# Altium PCB sparkfun-samd21-mini-breakout.PcbDoc
Units mil, origin at the board's own origin, x right, y up, seen from the top; angles counter-clockwise.
Board outline 700 x 1300 mil, 4 copper layers (Top, Route2, Route15, Bottom), stack 129.528 mil thick; 41 components, 46 nets, 164 pads, 66 vias.
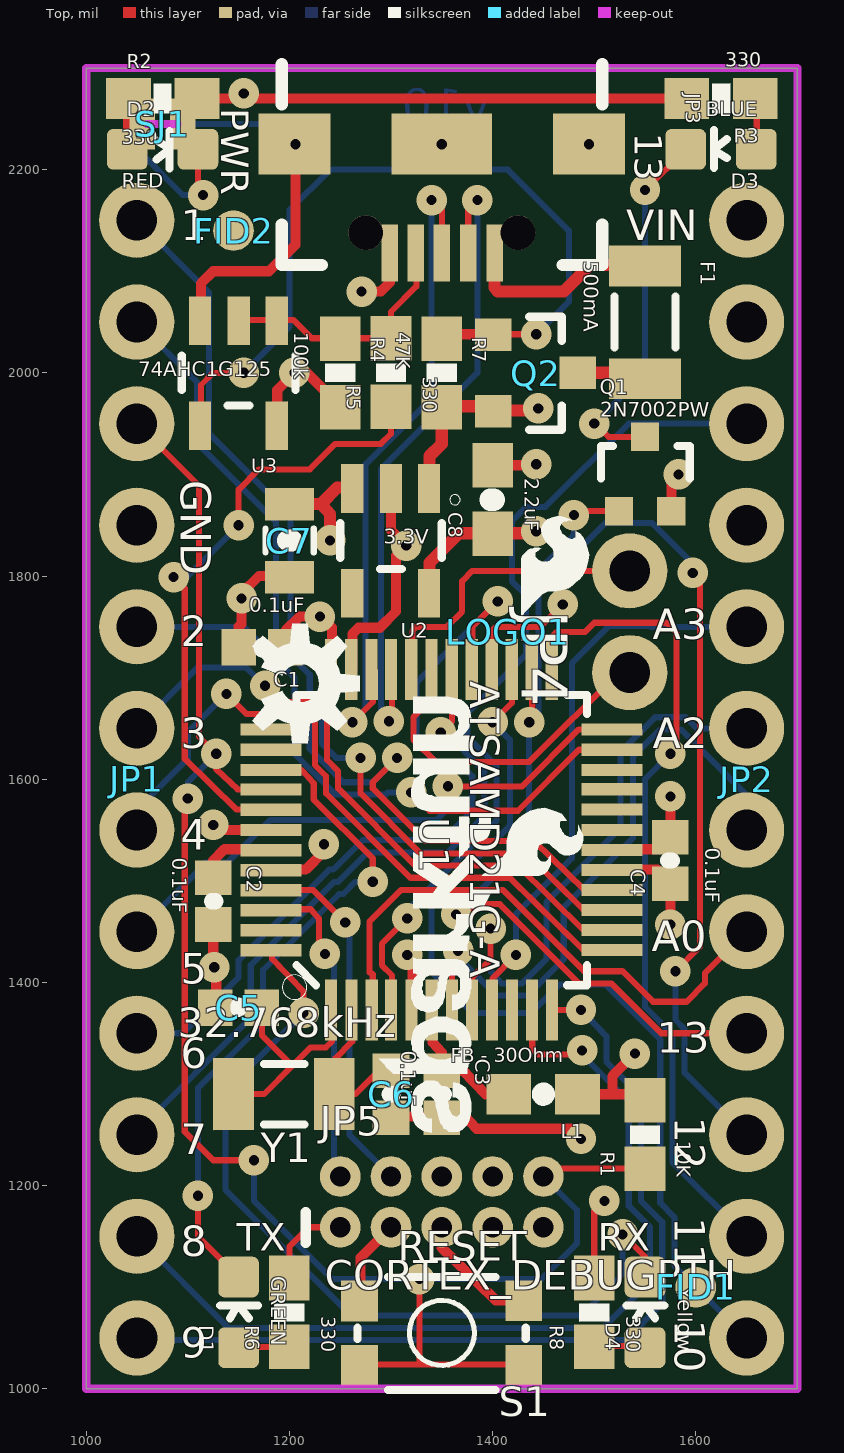
[diagram p0: Top view]
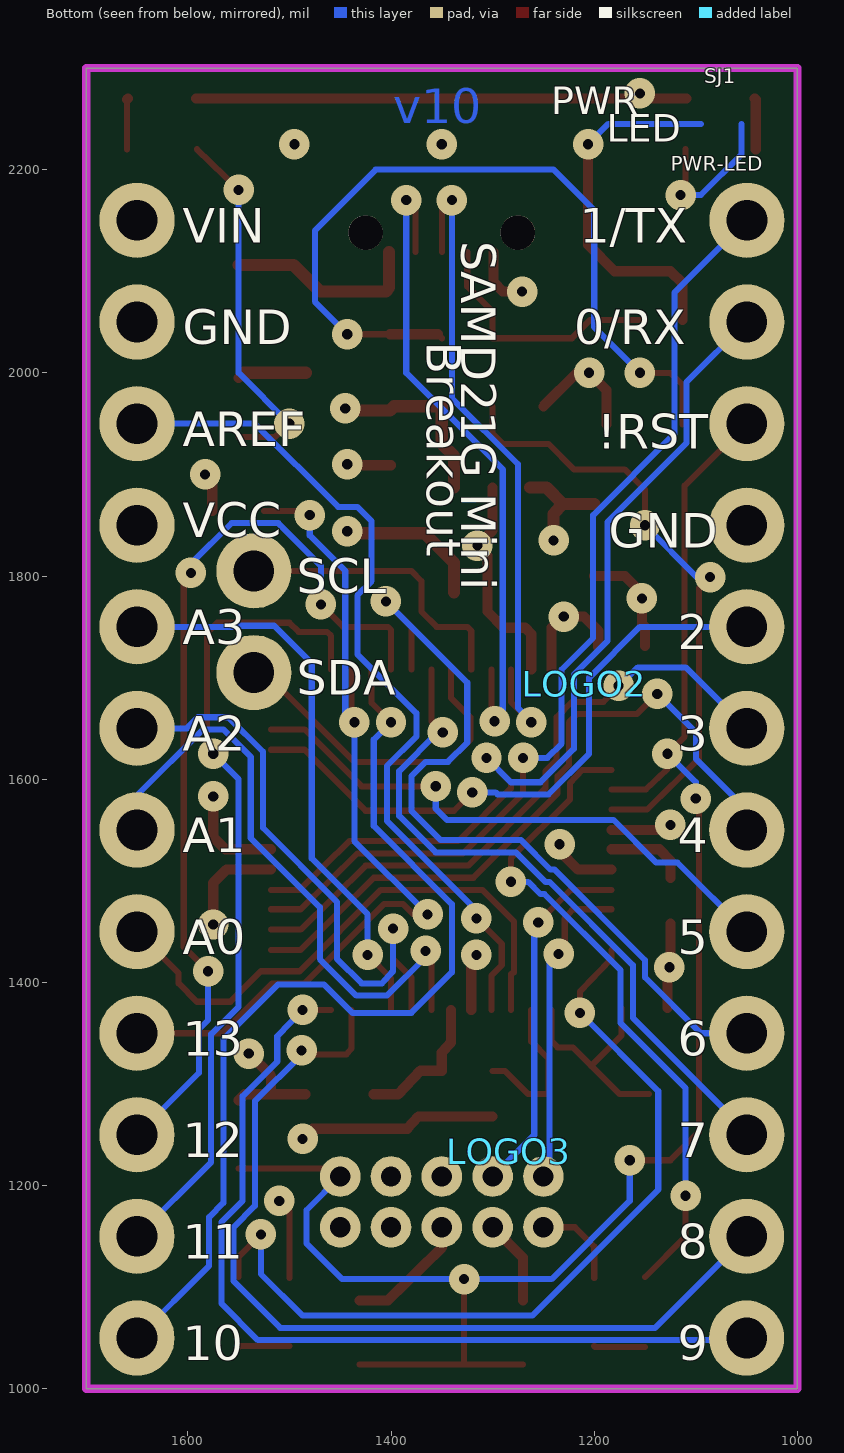
[diagram p1: Bottom view, seen from below]
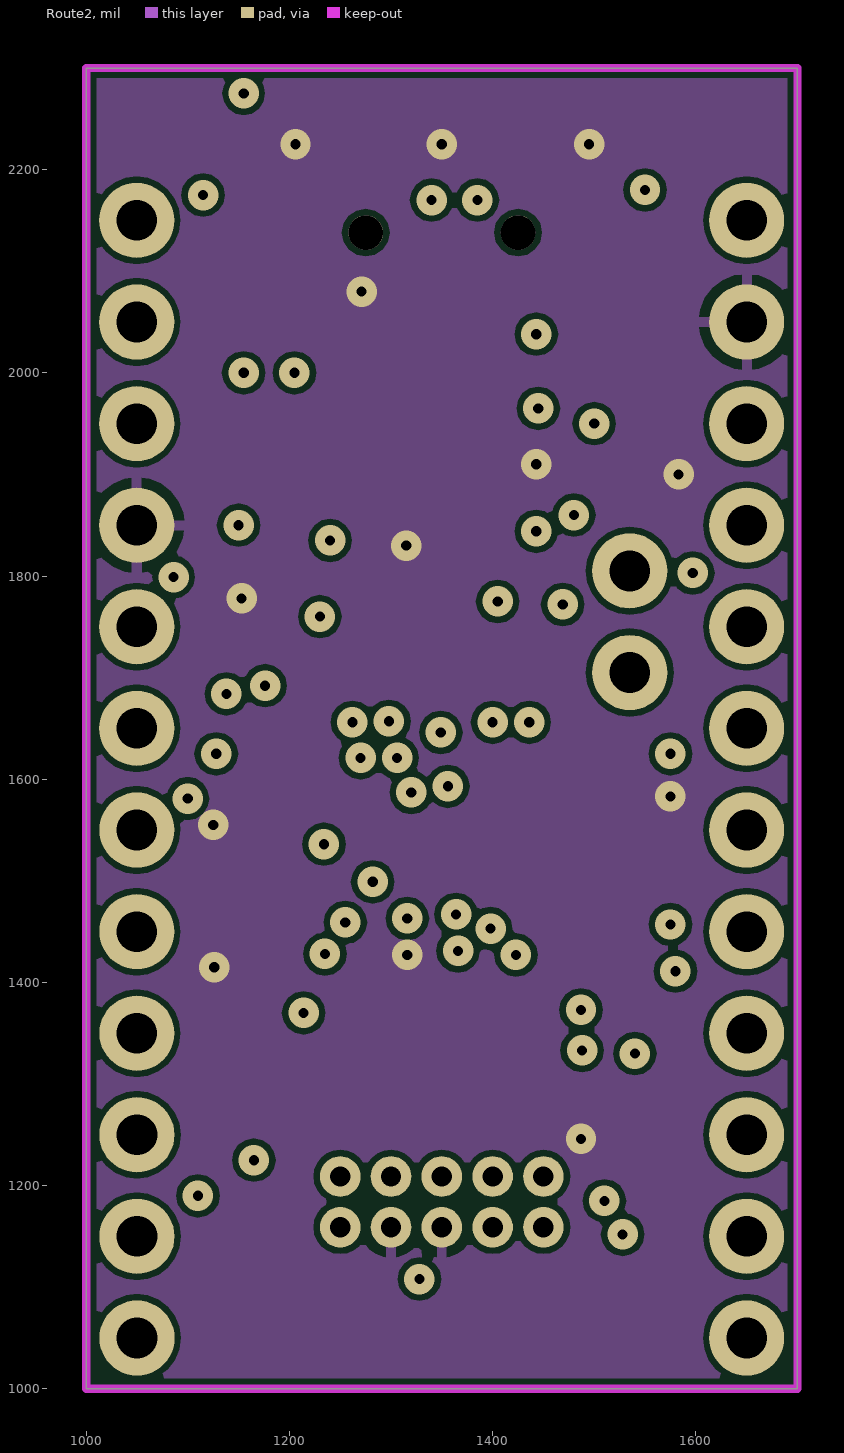
[diagram p2: Route2]
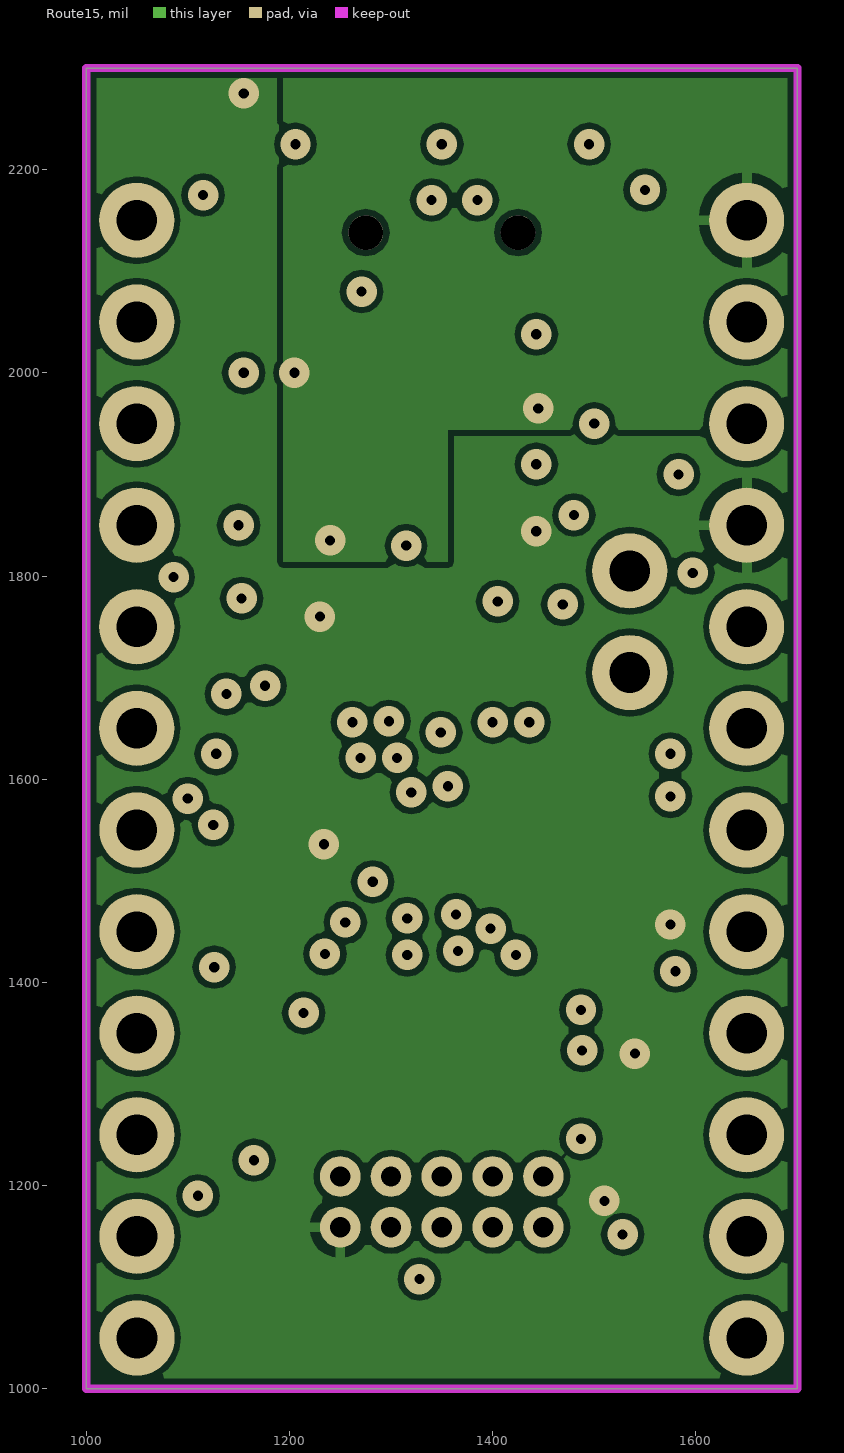
[diagram p3: Route15]

## Layer stack, top to bottom
Top Solder: solder mask 0.4, Solder Resist, Dk 3.5
Top: signal copper 1.378
Dielectric 1: core 59.0551, FR-4, Dk 4.8
Route2: signal copper 1.378
Dielectric 2: core 59.0551, FR-4, Dk 4.8
Route15: signal copper 1.378
Dielectric 3: core 5.9055, FR-4, Dk 4.8
Bottom: signal copper 1.378
Bottom Solder: solder mask 0.4, Solder Resist, Dk 3.5

## Board outline
1000,1000 1000,2300 1700,2300 1700,1000

## Design rules (kind name [scope] priority, off if disabled: settings)
Clearance [All] p1: gap=6 except(0: SMDPad-SMDPad SMDPad-THPad SMDPad-Via)
Clearance "Clearance (Same Net)" [All] p2: gap=0 except(6: SMDPad-SMDPad SMDPad-THPad SMDPad-Via)
HoleSize HoleSize_1 [All] p1: absolutevalues=TRUE maxlimit=100000 minlimit=10 maxpercent=80.000 minpercent=20.000
HoleSize [All] p2: absolutevalues=TRUE maxlimit=100 minlimit=1 maxpercent=80.000 minpercent=20.000
HoleToHoleClearance mdViaViaSameLayer [All] p1: gap=8 allowstackedmicrovias=TRUE
HoleToHoleClearance [All] p2: gap=10 allowstackedmicrovias=TRUE
PasteMaskExpansion mlMinCreamFrame [All] p1: expansion=0
PasteMaskExpansion [All] p2: expansion=0
PolygonConnect ThermalVias [IsVia] p1: connectstyle=Direct reliefconductorwidth=10 reliefentries=4 polygonreliefangle="90 Angle" airgapwidth=10
PolygonConnect [All] p2: connectstyle=Relief reliefconductorwidth=10 reliefentries=4 polygonreliefangle="90 Angle" airgapwidth=10
RoutingVias [All] p1: holewidth=28 width=50 viastyle="Through Hole" minholewidth=28 minwidth=50 maxholewidth=28 maxwidth=50
SilkToSilkClearance [All] p1 off: silktosilkclearance=10
SilkToSolderMaskClearance [IsPad] p1 off: minsilkscreentomaskgap=10 clearancetoexposedcopper=TRUE
SolderMaskExpansion mlMinStopFrame [All] p1: expansion=4
SolderMaskExpansion [All] p2: expansion=4
Width Width_1 [All] p1: maxlimit=100000 minlimit=6 preferedwidth=10
Width [All] p2: maxlimit=10 minlimit=10 preferedwidth=10
25 further rules are at their usual default settings.

## Components (designator, comment, footprint, x,y, rotation, side; value= is the part's Value field where it differs from the comment)
C1 "0.1uF" 0402-CAP 1173,1730 r180.01 top
C2 "0.1uF" 0402-CAP 1125,1480 r270 top
C3 "0.1uF" 0402-CAP 1350,1290 r270 top
C4 "0.1uF" 0402-CAP 1575,1520 r90.02 top
C5 "" 0402-CAP 1150,1375 r0 top
C6 "" 0402-CAP 1300,1290 r270 top
C7 "" 0805-CAP 1200,1835 r270 top
C8 "2.2uF" 0603-CAP 1400,1875 r90.02 top
D1 "GREEN" LED-0603 1150,1075 r0 top
D2 "RED" LED-0603 1075,2220 r270 top
D3 "BLUE" LED-0603 1625,2220 r90.02 top
D4 "Yellow" LED-0603 1550,1075 r0 top
F1 "500mA" PTC-1206 1550,2050 r270 top
FID1 "" FIDUCIAL-1X2 1600,1100 r0 top
FID2 "" FIDUCIAL-1X2 1145,2140 r0 top
FRAME1 "" CREATIVE_COMMONS 500,250 r0 top
JP1 "" 1X12_NO_SILK 1050,1050 r90.02 top
JP2 "" 1X12_NO_SILK 1650,2150 r270 top
JP3 "" USB-AB-MICRO-SMD_V03 1350,2225 r270 top
JP4 "" 1X02_NO_SILK 1535,1705 r90.02 top
JP5 "CORTEX_DEBUGPTH" 2X5-PTH-1.27MM 1350,1184 r0 top
L1 "FB - 30Ohm" 0603 1450,1290 r180.01 top
LOGO1 "" SFE_LOGO_FLAME_.1 1415,1745 r0 top
LOGO2 "" OSHW-LOGO-S 1210,1694 r89.98 bottom
LOGO3 "" SFE_LOGO_NAME_FLAME_.1 1284,1234 r89.98 bottom
Q1 "2N7002PW" SOT323 1550,1900 r0 top
Q2 "" SOT23-3 1440,2000 r270 top
R1 "10K" 0603-RES 1550,1250 r90.02 top
R2 "330" 0603-RES 1075,2270 r0 top
R3 "330" 0603-RES 1625,2270 r180.01 top
R4 "100k" 0603-RES 1250,2000 r270 top
R5 "330" 0603-RES 1300,2000 r90.02 top
R6 "330" 0603-RES 1200,1075 r90.02 top
R7 "47K" 0603-RES 1350,2000 r270 top
R8 "330" 0603-RES 1500,1075 r90.02 top
S1 "RESET" TACTILE_SWITCH_SMD_4.6X2.8MM 1350,1055 r180.01 top
SJ1 "PWR-LED" PAD-JUMPER-2-NC_BY_TRACE_NO_SILK 1075,2245 r180 bottom
U1 "ATSAMD21G-A" TQFP-48 1350,1540 r90.02 top
U2 "3.3V" SOT23-5 1300,1835 r180.01 top
U3 "74AHC1G125" SOT23-5 1150,2000 r180.01 top
Y1 "32.768kHz" CRYSTAL-SMD-3.2X1.5MM 1195,1290 r180.01 top

## Footprints (in the part's own frame and the unit in brackets; to place one, negate y for a bottom-side part, rotate by r counter-clockwise, add the part's x,y. Pads: shape width x height; smd on the part's side, far side on the other; paste and mask are expansions set on the pad)
1X02_NO_SILK [mil] "1X02_NO_SILK"
  round 74 hole 40: 1(0,0) 2(100,0)
1X12_NO_SILK [mil] "1X12_NO_SILK"
  round 74 hole 40: 1(0,0) 2(100,0) 3(200,0) 4(300,0) 5(400,0) 6(500,0) 7(600,0) 8(700,0) 9(800,0) 10(900,0) 11(1000,0) 12(1100,0)
2X5-PTH-1.27MM [mil] "2X5-PTH-1.27MM"
  round 40 hole 20: 1(-100,-25) 2(-100,25) 3(-50,-25) 4(-50,25) 5(0,-25) 6(0,25) 7(50,-25) 8(50,25) 9(100,-25) 10(100,25)
  silkscreen extent -134,-40 -134,-10
0402-CAP [mil] "0402-CAP"
  rect 34x36 smd: 1(-22.83,0) 2(23,0)
  silkscreen extent 0,-1 0,2
0603 [mil] "0603"
  rect 44x40 smd: 1(-33.46,0) 2(34,0)
  silkscreen extent -9,-9 9,9
0603-CAP [mil] "0603-CAP"
  rect 44x40 smd: 1(-33.46,0) 2(34,0)
  silkscreen extent 0,-1 0,2
0603-RES [mil] "0603-RES"
  rect 44x40 smd: 1(-33.46,0) 2(34,0)
  silkscreen extent -9,-15 9,15
0805-CAP [mil] "0805-CAP"
  rect 32x48 smd: 1(-35.43,0) 2(36,0)
  silkscreen extent -12,-24 12,24
CREATIVE_COMMONS [mil] "CREATIVE_COMMONS"
CRYSTAL-SMD-3.2X1.5MM [mil] "CRYSTAL-SMD-3.2X1.5MM"
  rect 40x71 smd: P$1(-49.21,0) P$2(50,0)
  silkscreen extent -20,-30 20,30
FIDUCIAL-1X2 [mil] "FIDUCIAL-1X2"
  rrect100% 40x40 smd: 1(0,0)
LED-0603 [mil] "LED-0603"
  rrect30% 40x40 smd: A(0,-34.53) C(0,35)
  silkscreen extent -18,-6 19,7
OSHW-LOGO-S [mil] "OSHW-LOGO-S"
PAD-JUMPER-2-NC_BY_TRACE_NO_SILK [mil] "PAD-JUMPER-2-NC_BY_TRACE_NO_SILK"
  rect 25x50 smd far side: 1(-20,0) 2(20,0)
  Bottom keep-out lines w8: 15,0 -15,0
PTC-1206 [mil] "PTC-1206"
  rect 40x71 smd: 1(-55.12,0) 2(56,0)
  silkscreen extent -25,-30 25,30
SFE_LOGO_FLAME_.1 [mil] "SFE_LOGO_FLAME_.1"
  silkscreen extent 13,15 80,114
SFE_LOGO_NAME_FLAME_.1 [mil] "SFE_LOGO_NAME_FLAME_.1"
SOT23-3 [mil] "SOT23-3"
  rect 32x36 smd: 1(-37.4,-39.37) 2(38,-39.37) 3(0,44)
  silkscreen extent -55,-4 56,28
SOT23-5 [mil] "SOT23-5"
  rect 22x48 smd: 1(-37.4,-51.19) 2(0,-51.19) 3(38,-51.19) 4(38,52) 5(-37.4,52)
  silkscreen extent -68,-45 50,28
SOT323 [mil] "SOT323"
  rect 28x28 smd: 1(-25.59,-36.42) 2(26,-36.42) 3(0,37)
  silkscreen extent -43,-4 44,28
TACTILE_SWITCH_SMD_4.6X2.8MM [mil] "TACTILE_SWITCH_SMD_4.6X2.8MM"
  rect 36x40 smd: 1(-80.71,-31.5) 2(81,-31.5) 3(81,32) 4(-80.71,32)
  silkscreen extent -83,-55 83,56
TQFP-48 [mil] "TQFP-48"
  rect 60x12 smd: 1(-167.32,109) 2(-167.32,89) 3(-167.32,69) 4(-167.32,50) 5(-167.32,30) 6(-167.32,10) 7(-167.32,-9.84) 8(-167.32,-29.53) 9(-167.32,-49.21) 10(-167.32,-68.9) 11(-167.32,-88.58) 12(-167.32,-108.27) 25(168,-108.27) 26(168,-88.58) 27(168,-68.9) 28(168,-49.21) 29(168,-29.53) 30(168,-9.84) 31(168,10) 32(168,30) 33(168,50) 34(168,69) 35(168,89) 36(168,109)
  rect 12x60 smd: 13(-108.27,-167.32) 14(-88.58,-167.32) 15(-68.9,-167.32) 16(-49.21,-167.32) 17(-29.53,-167.32) 18(-9.84,-167.32) 19(10,-167.32) 20(30,-167.32) 21(50,-167.32) 22(69,-167.32) 23(89,-167.32) 24(109,-167.32) 37(109,168) 38(89,168) 39(69,168) 40(50,168) 41(30,168) 42(10,168) 43(-9.84,168) 44(-29.53,168) 45(-49.21,168) 46(-68.9,168) 47(-88.58,168) 48(-108.27,168)
  silkscreen extent -157,-143 143,157
USB-AB-MICRO-SMD_V03 [mil] "USB-AB-MICRO-SMD_V03"
  round 34 hole 34: 1(87,-74.8) 1(87,75)
  rect 56x16 smd: D+1(107,0) D-1(107,26) GND1(107,-51.18) ID1(107,-25.59) VBUS1(107,52)
  rect 60x71 smd: SHIELD1(0,145) SHIELD3(0,-144.88)
  rect 60x99 smd: SHIELD2(0,0)
  silkscreen extent -79,-157 119,158

## Part data
C1 C2 C3 C4 C5 C6: library part 0402-CAP
C7: library part 0805-CAP
C8: library part 0603-CAP
D1 D2 D3 D4: library part LED-0603
F1: library part PTC-1206
FID1 FID2: library part FIDUCIAL-1X2
FRAME1: library part CREATIVE_COMMONS
JP1 JP2: library part 1X12_NO_SILK
JP3: library part USB-AB-MICRO-SMD_V03
JP4: library part 1X02_NO_SILK
JP5: library part 2X5-PTH-1.27MM
L1: library part 0603
LOGO1: library part SFE_LOGO_FLAME_.1
LOGO2: library part OSHW-LOGO-S
LOGO3: library part SFE_LOGO_NAME_FLAME_.1
Q1: library part SOT323
Q2: library part SOT23-3
R1 R2 R3 R4 R5 R6 R7 R8: library part 0603-RES
S1: library part TACTILE_SWITCH_SMD_4.6X2.8MM
SJ1: library part PAD-JUMPER-2-NC_BY_TRACE_NO_SILK
U1: library part TQFP-48
U2 U3: library part SOT23-5
Y1: library part CRYSTAL-SMD-3.2X1.5MM

## Via types
v1: diameter 30/30/30/30 (per signal layer), hole 10, Top to Bottom, 66 vias

## Nets (pads, with @x,y where several pads share a name; then routed paths per layer and width w, separated by ;. In a path a pad name is that pad's centre, name@x,y a point inside that pad or via, vN(x,y) a via of type N, cw(c..) or ccw(c..) an arc to the next point about the centre after c; other vN are vias at no path point)
3.3V: C1.1 C4.1 C8.1 JP2.4 JP5.1 L1.1 R1.2 R2.2 R3.2 R6.2 R8.2 U1.17 U1.36 U1.44 U2.5 | length 1202.5
  Top w6: R6.2 1200,1140 1219,1159 JP5.1 ; R8.2 1500,1175 v1(1510,1185)
  Top w10: R2.2 1150,2270 v1(1155,2275) 1160,2270 R3.2@1592,2270 ; U1.44@1183,1511 1216,1511 1234,1529 v1(1234,1536) ; C1.1@1196,1730 1196,1746 1210,1760 v1(1230,1760) 1242,1749 U1.36@1242,1708 ; L1.1@1484,1290 1518,1290 ; U1.17@1518,1511 1562,1511 1575,1498 v1(1575,1457) ; v1(1540,1330) 1518,1308 1518,1290 ; R1.2 1544,1290 1518,1290
  Top w12: U2.5@1338,1784 1338,1813 1367,1842 1400,1842 1441,1842 v1(1443,1844)
!RESET: JP1.10 JP5.10 R1.1 S1.3 S1.4 U1.40 | length 1732.1
  Top w6: JP1.10@1050,1950 1111,1889 1111,1642 v1(1128,1625) 1128,1610 1149,1590 U1.40@1183,1590 ; v1(1100,1581) 1097,1578 1097,1253 1125,1225 v1(1165,1225) ; S1.3@1270,1024 1328,1024 ; v1(1328,1108) 1328,1024 ; S1.4@1431,1024 1328,1024 ; JP5.10 1458,1217 R1.1@1550,1217
  Bottom w6: v1(1100,1581) 1100,1597 v1(1128,1625) ; v1(1165,1225) 1165,1185 1242,1108 v1(1328,1108) 1448,1108 1483,1143 1483,1176 JP5.10
A0: JP2.8 U1.3 | length 552.4
  Top w6: U1.3@1282,1373 1282,1408 1279,1410 1279,1460 1310,1491 1410,1491 1490,1411 1528,1411 1558,1381 1591,1381 1609,1399 1609,1409 JP2.8
A1: JP2.7 U1.7 | length 612.4
  Top w6: U1.7@1360,1373 1360,1425 v1(1366,1431)
  Bottom w6: v1(1366,1431) 1366,1425 1404,1387 1434,1387 1470,1423 1470,1474 1538,1542 1538,1622 1565,1649 1585,1649 1650,1584 JP2.7
A2: JP2.6 U1.8 | length 576.6
  Top w6: U1.8@1380,1373 1380,1405 1398,1423 v1(1398,1453)
  Bottom w6: v1(1398,1453) 1398,1411 1409,1399 1429,1399 1453,1423 1453,1479 1526,1552 1526,1627 1560,1661 1590,1661 1601,1650 JP2.6
A3: JP2.5 U1.9 | length 561
  Top w6: U1.9@1400,1373 1400,1404 v1(1423,1427)
  Bottom w6: v1(1423,1427) 1423,1467 1478,1522 1478,1714 1515,1751 1555,1751 1556,1750 JP2.5
AREF: JP2.3 U1.4 | length 844.5
  Top w6: U1.4@1301,1373 1301,1407 1291,1417 1291,1438 v1(1316,1463)
  Bottom w6: v1(1316,1463) 1316,1471 1404,1559 1404,1613 1375,1642 1375,1665 1433,1723 1433,1781 1419,1795 1419,1854 1433,1868 1452,1868 1534,1950 JP2.3
D0/RXI: JP1.11 U1.16 | length 917.1
  Top w6: v1(1306,1621) 1282,1597 1282,1591 1334,1539 1441,1539 1490,1491 U1.16@1518,1491
  Bottom w6: JP1.11@1050,2050 1109,1991 1109,1931 1187,1853 1187,1736 1220,1703 1220,1630 1253,1597 1282,1597 v1(1306,1621)
D1/TXO: JP1.12 U1.15 | length 964.1
  Top w6: v1(1270,1621) 1270,1586 1329,1527 1433,1527 1489,1472 U1.15@1518,1472
  Bottom w6: JP1.12@1050,2150 1121,2079 1121,1940 1201,1860 1201,1739 1232,1708 1232,1635 1246,1621 v1(1270,1621)
D2: JP1.8 U1.23 | length 613.4
  Top w6: v1(1320,1587) 1338,1569 1425,1569 1485,1629 U1.23@1518,1629
  Bottom w6: JP1.8@1050,1750 1155,1750 1205,1700 1205,1625 1245,1585 1295,1585 1297,1587 v1(1320,1587)
D3: JP1.7 U1.14 | length 634
  Top w6: v1(1176,1692) 1191,1676 1222,1676 1237,1661 1237,1619 1248,1608 1248,1591 1324,1515 1425,1515 1489,1452 U1.14@1518,1452
  Bottom w6: JP1.7@1050,1650 1110,1710 1157,1710 v1(1176,1692)
D4: JP1.6 U1.13 | length 689.1
  Top w6: v1(1138,1684) 1158,1664 1217,1664 1225,1656 1225,1614 1236,1603 1236,1586 1319,1503 1417,1503 1489,1432 U1.13@1518,1432
  Bottom w6: JP1.6@1050,1550 1050,1570 1100,1620 1100,1646 v1(1138,1684)
D5: JP1.5 U1.24 | length 563.3
  Top w6: v1(1356,1593) 1429,1593 1485,1649 U1.24@1518,1649
  Bottom w6: JP1.5@1050,1450 1118,1518 1139,1518 1181,1560 1345,1560 1356,1571 v1(1356,1593)
D6: JP1.4 U1.29 | length 782.8
  Top w6: U1.29@1380,1708 1380,1750 v1(1405,1775)
  Bottom w6: JP1.4@1050,1350 1095,1350 1150,1405 1150,1422 1239,1511 1243,1511 1272,1540 1351,1540 1380,1569 1380,1603 1366,1617 1344,1617 1325,1636 1325,1695 v1(1405,1775)
D7: JP1.3 U1.30 | length 673.6
  Top w6: v1(1349,1646) 1360,1657 U1.30@1360,1708
  Bottom w6: JP1.3@1050,1250 1050,1253 1162,1365 1162,1417 1244,1499 1248,1499 1277,1528 1356,1528 1392,1564 1392,1608 1354,1646 v1(1349,1646)
D8: JP1.2 U1.11 | length 907.6
  Top w6: U1.11@1439,1373 1439,1335 1444,1329 1484,1329 v1(1488,1333)
  Bottom w6: JP1.2 1140,1060 1509,1060 1555,1106 1555,1159 1534,1180 1534,1283 1488,1329 v1(1488,1333)
D9: JP1.1 U1.12 | length 882.6
  Top w6: U1.12@1459,1373 v1(1487,1373)
  Bottom w6: JP1.1 1052,1048 1531,1048 1567,1084 1567,1164 1546,1185 1546,1288 1512,1322 1512,1347 v1(1487,1373)
D10/SS: JP2.12 U1.27 | length 949.5
  Top w6: v1(1400,1656) 1419,1675 U1.27@1419,1708
  Bottom w6: v1(1400,1656) 1417,1639 1417,1554 1340,1477 1340,1410 1380,1370 1438,1370 1466,1398 1511,1398 1565,1344 1565,1183 1579,1169 1579,1121 JP2.12
D11/MOSI: JP2.11 U1.25 | length 812.8
  Top w6: U1.25@1459,1708 1459,1741 1463,1745 1491,1745 1500,1754 1571,1754 1581,1744 1581,1631 v1(1575,1625)
  Bottom w6: v1(1575,1625) 1550,1600 1550,1376 1577,1349 1577,1223 JP2.11
D12/MISO: JP2.10 U1.28 | length 922.2
  Top w6: U1.28@1400,1708 1400,1747 1403,1750 1447,1750 v1(1469,1772) ; v1(1580,1411) 1604,1435 1604,1796 v1(1597,1803)
  Bottom w6: v1(1469,1772) 1469,1810 1511,1852 1557,1852 1597,1812 v1(1597,1803) ; v1(1580,1411) 1580,1363 1589,1354 1589,1311 JP2.10
D13/SCK: JP2.9 Q1.1 U1.26 | length 883.7
  Top w6: v1(1364,1467) 1378,1467 1388,1477 1407,1477 1485,1399 1517,1399 1566,1350 JP2.9 ; v1(1436,1656) 1439,1659 U1.26@1439,1708 ; v1(1480,1860) 1484,1864 Q1.1@1525,1864
  Bottom w6: v1(1364,1467) 1436,1539 v1(1436,1656) 1445,1665 1445,1805 1480,1840 v1(1480,1860)
GND: C1.2 C2.2 C3.2 C4.2 C5.1 C6.2 C7.2 C8.2 JP1.9 JP2.2 JP3.GND1 JP3.SHIELD1 JP3.SHIELD2 JP3.SHIELD3 JP5.3 JP5.5 Q1.2 S1.1 S1.2 SJ1.1 U1.5 U1.18 U1.35 U1.42 U2.2 U3.3 | length 1548.2
  Top w6: v1@1125,1416 v1(1126,1415) ; C1.2@1150,1731 C1.2@1151,1730 ; v1(1153,1778) v1@1153,1783
  Top w10: U3.3@1113,2052 1113,2088 1125,2100 1180,2100 1206,2126 v1(1206,2225) JP3.SHIELD3@1201,2220 ; v1@1125,1416 C2.2@1125,1458 ; v1(1125,1555) 1130,1550 U1.42@1183,1550 ; v1(1126,1415) 1128,1414 C5.1@1128,1375 ; C1.2@1150,1731 1150,1750 1153,1753 v1(1153,1778) ; v1@1153,1783 1170,1800 C7.2@1200,1800 ; U1.35@1262,1708 1262,1743 1268,1749 1289,1749 1305,1765 1305,1820 v1(1315,1830) 1300,1845 U2.2@1300,1887 ; S1.2@1270,1087 1270,1129 JP5.3 ; v1(1271,2080) 1290,2080 1299,2089 JP3.GND1@1299,2119 ; C6.2@1300,1268 1350,1268 1373,1268 1384,1256 1477,1256 v1(1487,1246) ; v1(1316,1427) 1321,1422 U1.5@1321,1373 ; JP5.5 1350,1139 1403,1087 S1.1@1431,1087 ; C8.2 1442,1909 v1(1443,1910) ; U1.18@1518,1531 1563,1531 C4.2 v1(1575,1583) ; Q1.2@1576,1864 1576,1893 v1(1583,1900)
  Bottom w6: 1095,2245 1186,2245 v1(1206,2225)
  other v1: 1350,2225 1495,2225
N$1: F1.1 JP3.VBUS1 | length 195.8
  Top w12: JP3.VBUS1@1402,2119 1402,2084 1405,2080 1470,2080 1496,2106 F1.1@1550,2106
N$2: C5.2 U1.1 Y1.P$2 | length 218
  Top w6: Y1.P$2@1146,1290 1175,1290 1203,1318 ; C5.2 1173,1348 1203,1318 ; U1.1@1242,1373 1242,1342 1236,1336 1221,1336 1203,1318
N$3: D3.C Q1.3 | length 363.1
  Top w6: v1(1500,1950) 1514,1937 Q1.3 ; v1(1550,2180) D3.C@1591,2220
  Bottom w6: v1(1500,1950) 1550,2000 v1(1550,2180)
N$4: C6.1 U1.2 Y1.P$1 | length 154.6
  Top w6: U1.2@1262,1373 1262,1342 1245,1325 1245,1290 1265,1290 1288,1313 C6.1@1300,1313
N$5: D2.A R2.1 | length 50.4
  Top w10: D2.A@1041,2220 1041,2269 R2.1@1042,2270
N$6: D3.A R3.1 | length 50.4
  Top w6: D3.A@1660,2220 R3.1@1660,2269
  Top w10: R3.1@1659,2270 R3.1@1660,2269
N$7: F1.2 Q2.3 | length 68.1
  Top w10: F1.2@1545,2000 F1.2@1550,1995
  Top w12: Q2.3 F1.2@1545,2000
N$8: JP3.ID1 R4.1 R5.2 U3.1 U3.2 | length 252.8
  Top w6: U3.2@1150,2052 1188,2052 1204,2052 1222,2034 1250,2034 R5.2 1300,2060 1325,2085 JP3.ID1@1325,2119
N$9: Q2.1 R7.1 U3.4 | length 790.9
  Top w6: U3.4@1113,1949 1113,1988 1125,2000 v1(1155,2000) ; R7.1@1350,2034 R7.1@1354,2038 ; Q2.1@1401,2038 v1(1443,2038)
  Top w10: R7.1@1354,2038 Q2.1@1401,2038
  Bottom w6: v1(1155,2000) 1200,2045 1200,2160 1240,2200 1415,2200 1475,2140 1475,2070 v1(1443,2038)
N$10: D1.A R6.1 | length 50.4
  Top w6: D1.A@1150,1041 1199,1041 R6.1@1200,1042
N$11: D4.A R8.1 | length 50.4
  Top w6: R8.1@1500,1042 1549,1042 D4.A@1550,1041
N$12: D2.C SJ1.2 | length 153.4
  Top w6: D2.C 1110,2181 v1(1115,2175)
  Bottom w6: 1055,2245 1055,2215 1095,2175 v1(1115,2175)
RX_LED: D4.C U1.48 | length 829.9
  Top w6: U1.48@1183,1432 1183,1423 1214,1391 v1(1214,1370) ; v1(1528,1152) 1550,1130 D4.C
  Bottom w6: v1(1214,1370) 1137,1293 1137,1196 1261,1072 1487,1072 1528,1113 v1(1528,1152)
SCL: JP4.2 U1.32 | length 294
  Top w6: U1.32@1321,1708 1321,1746 1325,1750 1355,1750 1370,1765 1370,1795 1380,1805 JP4.2
SDA: JP4.1 U1.31 | length 336.4
  Top w6: U1.31@1340,1708 1341,1708 1341,1680 1322,1661 1322,1639 1344,1617 1436,1617 1524,1705 JP4.1
SWCLK: JP5.4 U1.45 | length 353.9
  Top w6: U1.45@1183,1491 1223,1491 v1(1255,1459)
  Bottom w6: v1(1255,1459) 1255,1458 1259,1454 1259,1250 JP5.4
SWDIO: JP5.2 U1.46 | length 312.7
  Top w6: U1.46@1183,1472 1221,1472 1229,1463 1229,1434 v1(1235,1428)
  Bottom w6: v1(1235,1428) 1244,1419 1244,1215 JP5.2
TX_LED: D1.C U1.39 | length 656.8
  Top w6: v1(1110,1190) 1110,1150 D1.C ; U1.39@1183,1609 1212,1609 1224,1596 1224,1580 1282,1522 v1(1282,1499)
  Bottom w6: v1(1110,1190) 1110,1296 1174,1360 1174,1412 1249,1487 1253,1487 1265,1499 v1(1282,1499)
USB_D+: JP3.D+1 U1.34 | length 661.5
  Top w6: v1(1262,1656) 1282,1676 U1.34@1282,1708 ; v1(1340,2170) 1350,2160 JP3.D+1@1350,2119
  Bottom w6: v1(1262,1656) 1275,1670 1275,1910 1340,1975 v1(1340,2170)
USB_D-: JP3.D-1 U1.33 | length 662.6
  Top w6: v1(1298,1657) 1301,1660 U1.33@1301,1708 ; JP3.D-1@1376,2119 1376,2161 v1(1385,2170)
  Bottom w6: v1(1298,1657) 1290,1665 1290,1905 1385,2000 v1(1385,2170)
USB_HOST_EN: R5.1 U1.41 | length 609.9
  Top w6: v1(1086,1799) 1097,1788 1097,1620 1148,1570 U1.41@1183,1570 ; v1(1150,1850) 1150,1885 1170,1905 1220,1905 1245,1930 1290,1930 1300,1940 R5.1@1300,1967
  Bottom w6: v1(1086,1799) 1099,1799 v1(1150,1850)
VDDANA: C3.1 L1.2 U1.6 | length 140.3
  Top w10: U1.6@1341,1373 1341,1341 1350,1331 1350,1313 1371,1313 1393,1290 L1.2@1417,1290
VDDCORE: C2.1 U1.43 | length 79.6
  Top w10: C2.1@1125,1503 1125,1520 1136,1531 U1.43@1183,1531
VIN: C7.1 JP2.1 Q2.2 R4.2 R7.2 U2.1 U2.3 U3.5 | length 409.2
  Top w6: C7.1@1200,1870 C7.1@1200,1871
  Top w10: U3.5@1188,1949 1188,1983 v1(1205,2000) 1217,2000 R4.2@1250,1967
  Top w12: C7.1@1200,1871 1231,1871 ; v1(1240,1835) 1240,1861 1231,1871 ; U2.3@1263,1887 1247,1887 1231,1871 ; U2.1@1338,1887 1338,1918 1350,1930 1350,1967 1397,1967 1401,1963 1443,1963 v1(1445,1965)
pads on no net: FID1.1 FID2.1 JP3.1 JP5.6 JP5.7 JP5.8 JP5.9 U1.10 U1.19 U1.20 U1.21 U1.22 U1.37 U1.38 U1.47 U2.4

## Polygon pours and split planes (outlines as drawn)
GND on Route2 "Route2-GND" (solid, remove dead copper, pour order 0): 996,2304 996,996 1704,996 1704,2304
3.3V on Route15 "Route15-3.3V" (solid, remove dead copper, pour order 2): 996,2304 996,996 1704,996 1704,2304
VIN on Route15 "Route15-VIN" (solid, remove dead copper, pour order 4): 1194,2306 1194,1814 1356,1814 1356,1944 1706,1944 1706,2306

## Keep-outs
Keep-Out Layer:
  the board outline again, w8

## Other copper
Bottom:
  text "v10" at 1397.59,2245.81 h34

## Silkscreen, mask and mechanical layers (free items; w line width, h text height)
Top Overlay:
  text "PWR" at 1133,2260.33 h27.2 r270
  text "13" at 1539.8,2236.3 h27.2 r270.02
  text "1" at 1093,2130.67 h29.75
  text "VIN" at 1531.72,2130.67 h29.75
  text "GND" at 1093,1894.12 h29.75 r270
  text "A3" at 1557.51,1737.67 h29.75
  text "2" at 1093,1730.67 h29.75
  text "3" at 1093,1630.67 h29.75
  text "A2" at 1557.51,1630.67 h29.75
  text "4" at 1093,1530.67 h29.75
  text "A0" at 1556.51,1430.67 h29.75
  text "5" at 1093,1398.67 h29.75
  text "13" at 1561.46,1330.67 h29.75
  text "6" at 1093,1315.67 h29.75
  text "12" at 1579.25,1267.83 h29.75 r270.02
  text "7" at 1093,1230.67 h29.75
  text "11" at 1579.26,1168.88 h29.75 r270.02
  text "TX" at 1148.26,1136 h27.2
  text "RX" at 1503.26,1136 h27.2
  text "8" at 1093,1130.67 h29.75
  text "10" at 1579.25,1067.83 h29.75 r270.02
  text "9" at 1093,1030.67 h29.75
Bottom Overlay:
  text "PWR" at 1242.05,2254.52 h27.2
  text "LED" at 1187.67,2227.32 h27.2
  text "SAMD21G Mini" at 1330.87,2129.66 h34 r89.98
  text "1/TX" at 1214.16,2127.91 h34
  text "VIN" at 1605,2127.91 h34
  text "Breakout" at 1364.84,2030.53 h34 r89.98
  text "0/RX" at 1219.83,2027.91 h34
  text "GND" at 1605,2027.91 h34
  text "AREF" at 1605,1927.91 h34
  text "!RST" at 1197.17,1925.07 h34
  text "VCC" at 1605,1837.91 h34
  text "GND" at 1185.84,1827.91 h34
  text "SCL" at 1493,1782.91 h34
  text "A3" at 1605,1732.91 h34
  text "2" at 1117.86,1727.91 h34
  text "SDA" at 1493,1682.91 h34
  text "3" at 1117.86,1627.91 h34
  text "A2" at 1605,1627.91 h34
  text "4" at 1117.86,1527.91 h34
  text "A1" at 1605,1527.91 h34
  text "5" at 1117.86,1427.91 h34
  text "A0" at 1605,1427.91 h34
  text "6" at 1117.86,1327.91 h34
  text "13" at 1605,1327.91 h34
  text "7" at 1117.86,1227.91 h34
  text "12" at 1605,1227.91 h34
  text "8" at 1117.86,1127.91 h34
  text "11" at 1605,1127.91 h34
  text "9" at 1117.86,1027.91 h34
  text "10" at 1605,1027.91 h34
tDocu:
  text "This is a 4-layer board!" at 1010.96,2400 h29.75

## Text inside footprints (layer, text, board x,y; h text height)
JP3: tDocu "PCB Front" at 1584.99,2408.47 h18.6 r270